# Altium PCB TIDA-01560_PCB.PcbDoc
Units mil, origin at the board's own origin, x right, y up, seen from the top; angles counter-clockwise.
Board outline 2598.43 x 1968.5 mil, 2 copper layers (Top Layer, Bottom Layer), stack 62 mil thick; 50 components, 29 nets, 112 pads, 8 vias.
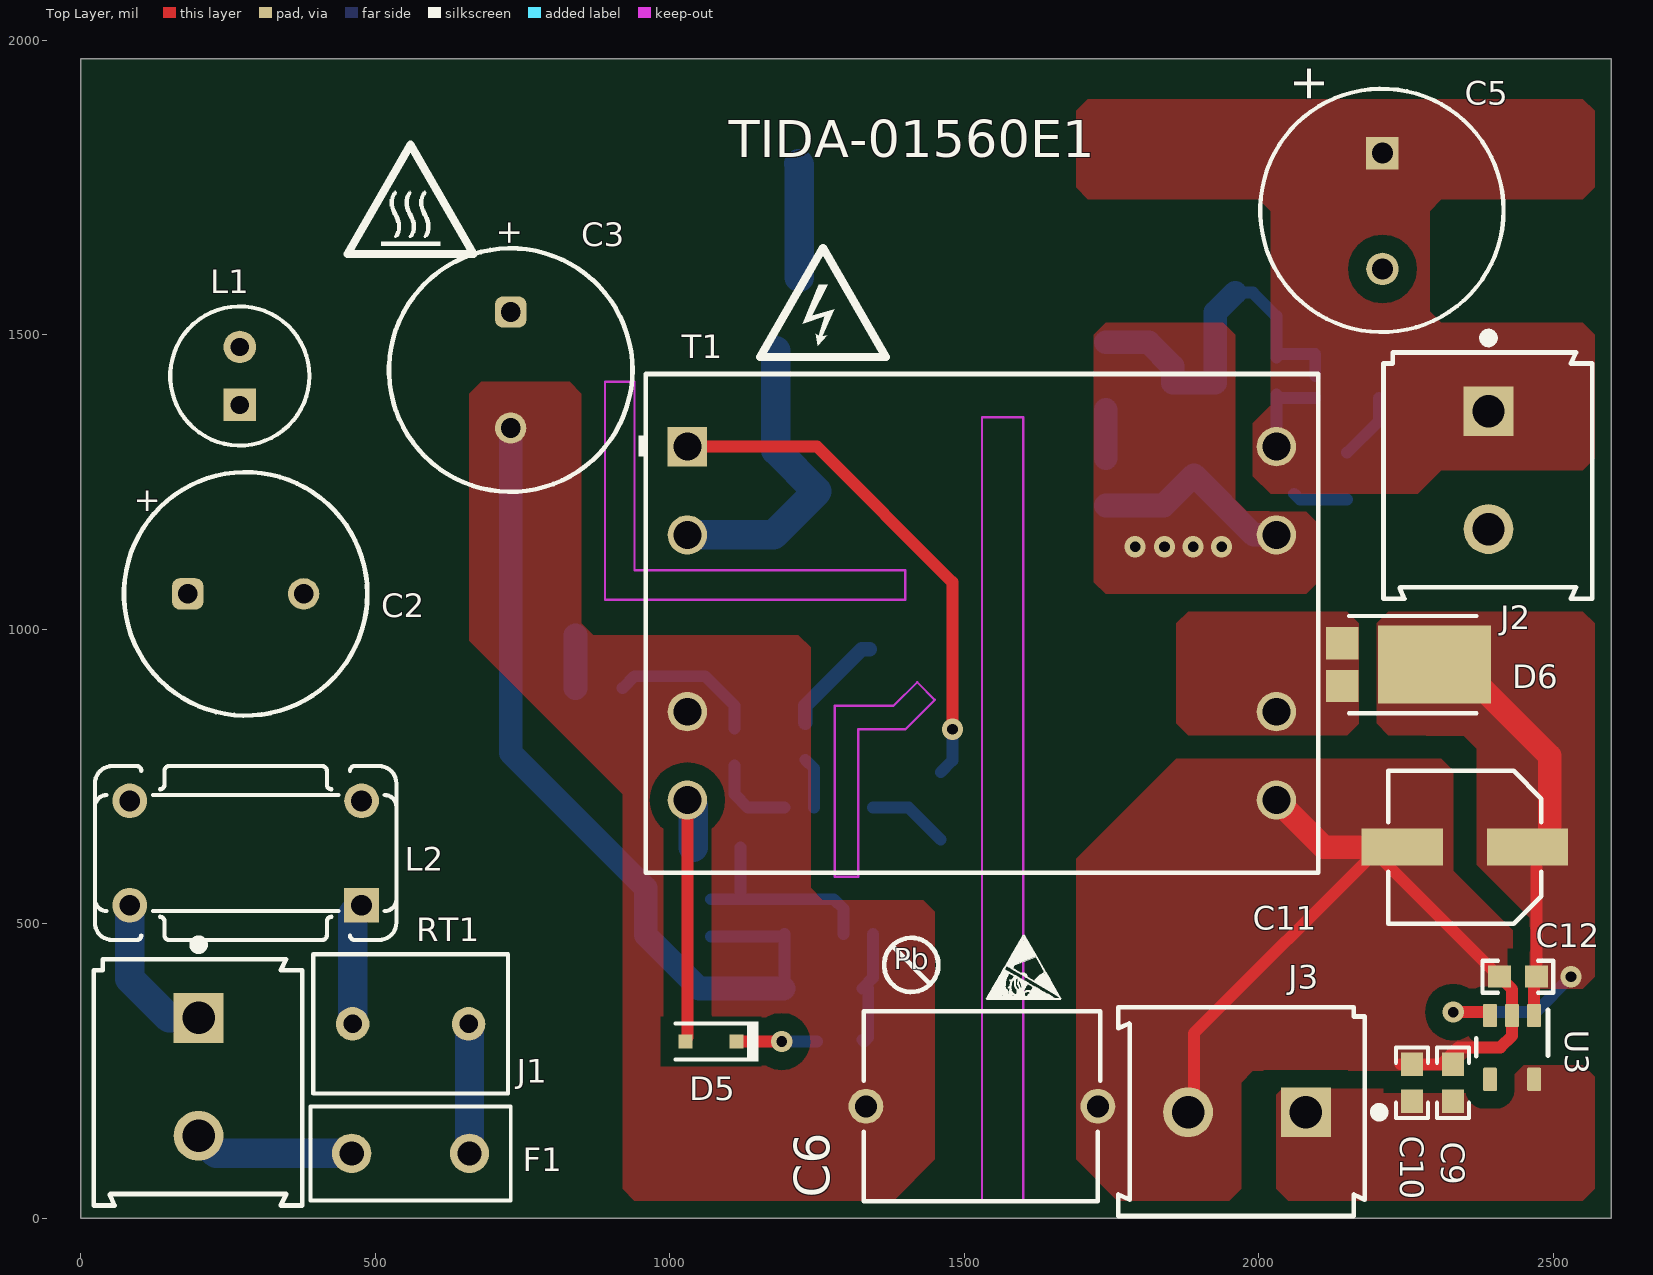
[diagram p0: Top Layer view]
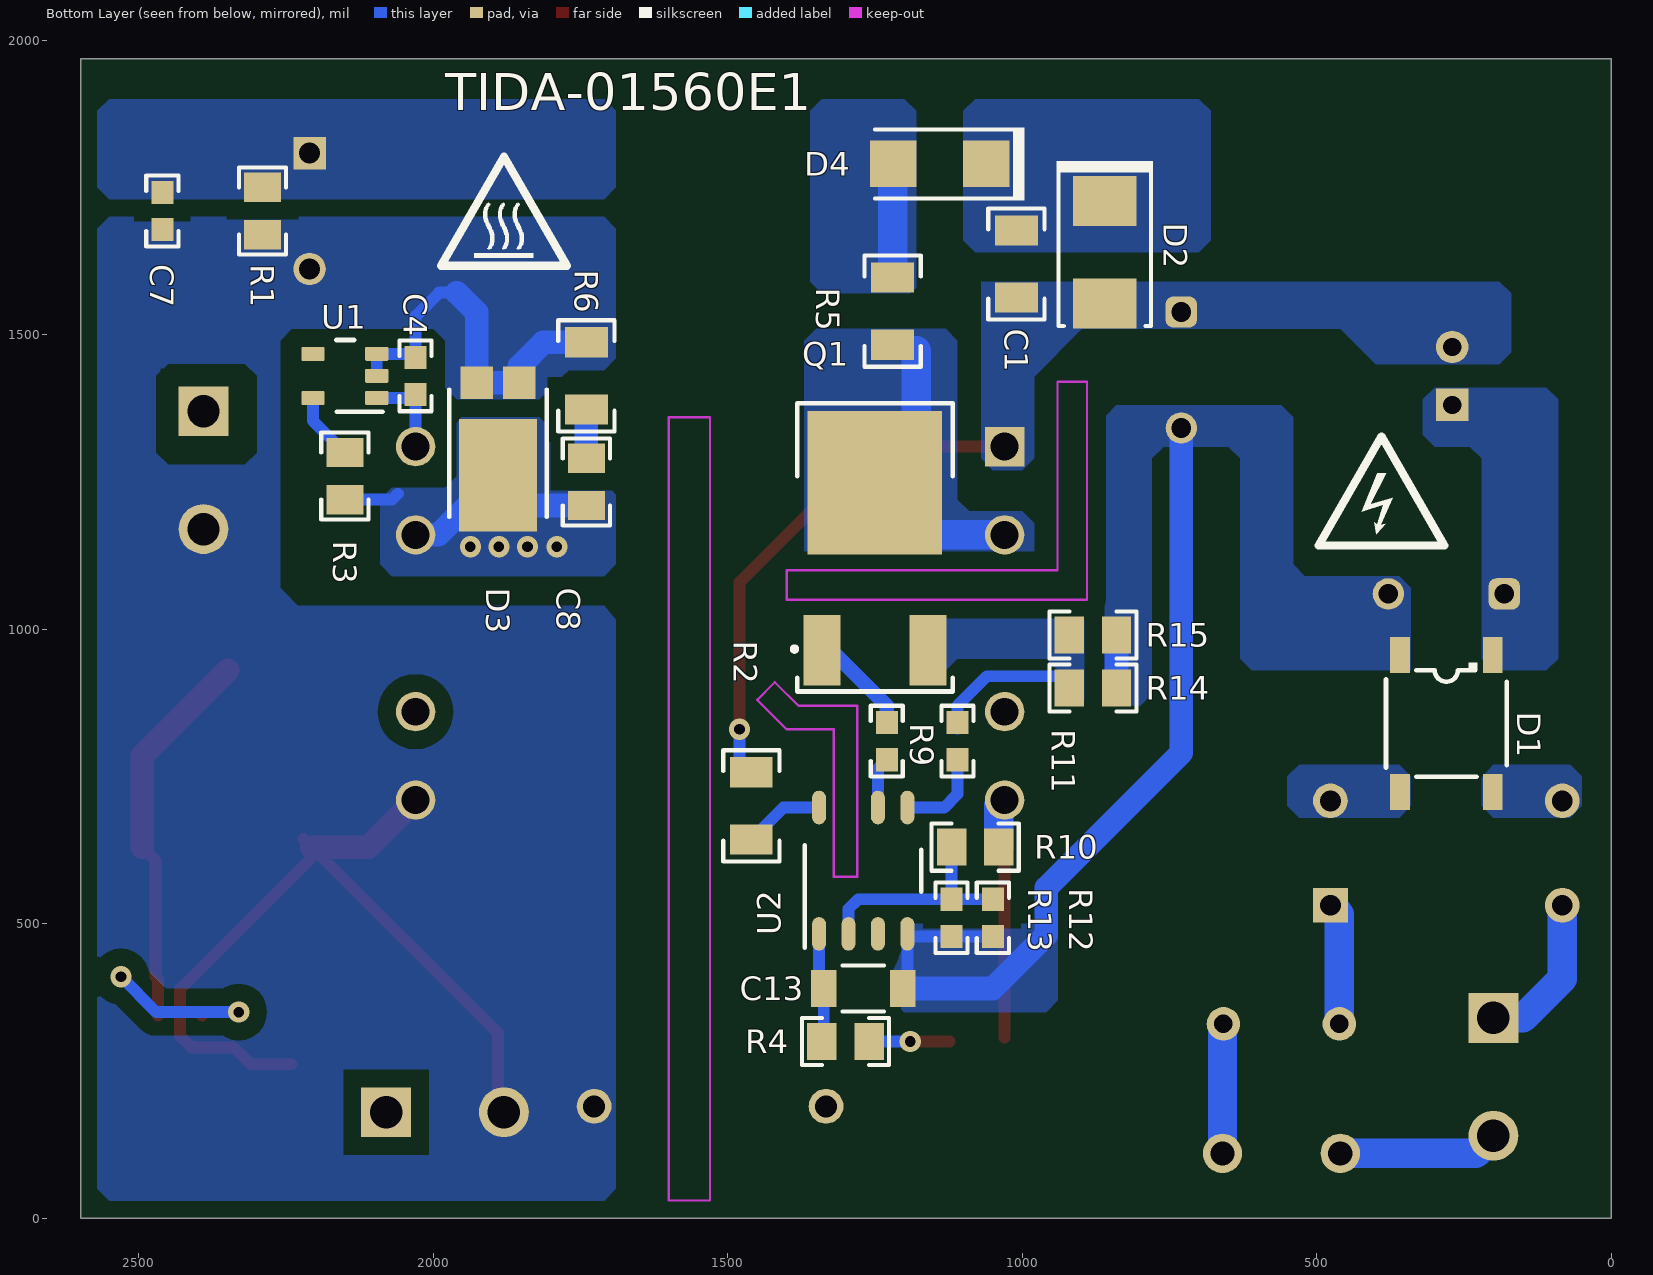
[diagram p1: Bottom Layer view, seen from below]
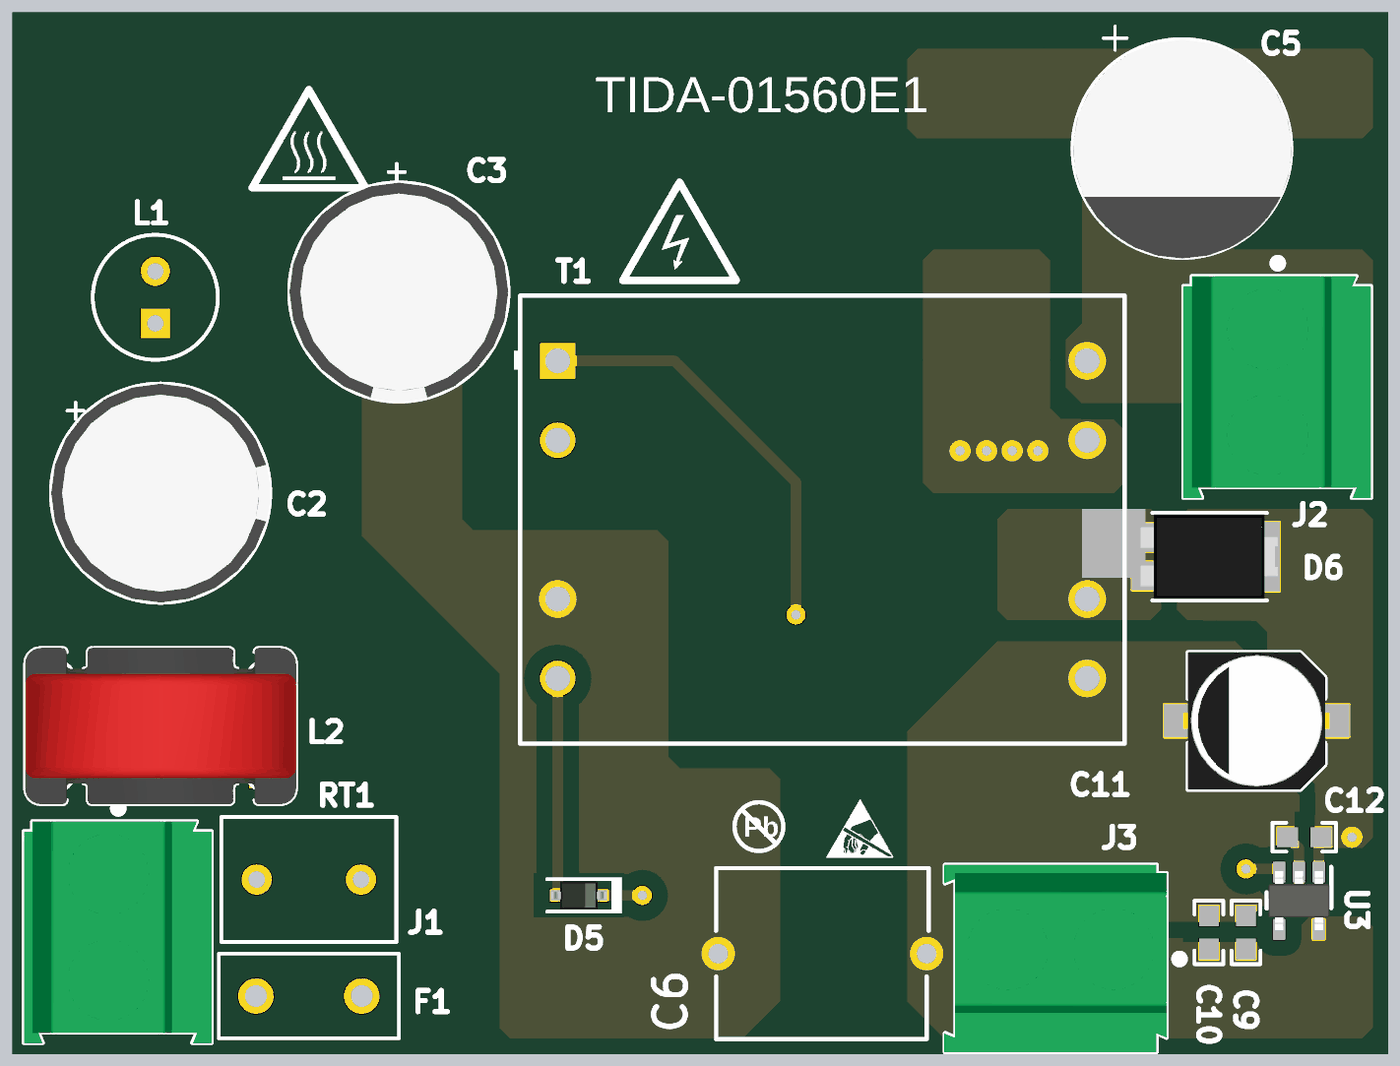
[diagram p2: 3D render of the assembled board from above, using the file's embedded part models]

## Layer stack, top to bottom
Top Solder: solder mask 0.4, Solder Resist, Dk 3.5
Top Layer: signal copper 1.4
Dielectric1: core 59.2, FR-4, Dk 4.8
Bottom Layer: signal copper 1.4
Bottom Solder: solder mask 0.4, Solder Resist, Dk 3.5

## Board outline
0,0 2598.43,0 2598.43,1968.5 0,1968.5

## Design rules (kind name [scope] priority, off if disabled: settings)
AcuteAngle [All] p1: minimum=4.50000000000000E+0001 checktracksonly=FALSE
AssemblyTestPointUsage [All] p1: valid=2
BoardOutlineClearance BoardOutlineClearance_MountingHoles [OnCopper and InComponentClass('Mounting Holes')] p1: gap=40
BoardOutlineClearance BoardOutlineClearance_Poly [OnCopper and IsPoly] p2: gap=25
BoardOutlineClearance [OnCopper and Not InComponentClass('Logo') and not InComponentClass('FiducialMark') and not InRegion(1000,500,4000,800) and not InPoly] p3: gap=40
Clearance Clearance_Keepouts [((IsTrack Or IsArc) And Not InPoly) And IsFree and IsKeepOut vs ((IsTrack Or IsArc) And Not InPoly) And IsFree and IsKeepOut] p1: gap=0
Clearance Clearance_Poly [InPolygon] p2: gap=30
Clearance [All] p3: gap=7.87
ComponentClearance ComponentClearance_MountingHoles_FiducialMarks [InComponentClass('Mounting Holes') vs InComponentClass('FiducialMark')] p1: gap=50 collisioncheckmode=3 verticalgap=10 showdistances=FALSE
ComponentClearance ComponentClearance_Shunt [InComponentClass('Header') vs InComponentClass('Shunt')] p2: gap=0 collisioncheckmode=3 verticalgap=0 showdistances=FALSE
ComponentClearance ComponentClearance_Logo [InComponentClass('Logo')] p3: gap=50 collisioncheckmode=3 verticalgap=10 showdistances=FALSE
ComponentClearance ComponentClearance_ScrewToNut [(HasFootprint('NY PMS 440 0025 PH')) vs (HasFootprint('Keystone_1902C'))] p4: gap=5 collisioncheckmode=3 verticalgap=10 showdistances=FALSE
ComponentClearance ComponentClearance_MountingHoles [InComponentClass('Mounting Holes')] p5: gap=250 collisioncheckmode=3 verticalgap=100000 showdistances=FALSE
ComponentClearance ComponentClearance_SmallPassives [HasFootprint('0201*') or HasFootprint('0402*') or HasFootprint('0508') or HasFootprint('0603*') or HasFootprint('0612') or HasFootprint('0805*') or HasFootprint('0815*') or HasFootprint('0830*') or HasFootprint('1206*') or HasFootprint('1210*') or HasFootprint('1808*') or HasFootprint('1812*') or HasFootprint('1825*') or HasFootprint('2010*') or HasFootprint('2220*') or HasFootprint('2225*') or HasFootprint('2512*') or HasFootprint('2728*') or HasFootprint('3518*') vs HasFootprint('0201*') or HasFootprint('0402*') or HasFootprint('0508') or HasFootprint('0603*') or HasFootprint('0612') or HasFootprint('0805*') or HasFootprint('0815*') or HasFootprint('0830*') or HasFootprint('1206*') or HasFootprint('1210*') or HasFootprint('1808*') or HasFootprint('1812*') or HasFootprint('1825*') or HasFootprint('2010*') or HasFootprint('2220*') or HasFootprint('2225*') or HasFootprint('2512*') or HasFootprint('2728*') or HasFootprint('3518*')] p6: gap=10 collisioncheckmode=3 verticalgap=10 showdistances=FALSE
ComponentClearance ComponentClearance_THtoSMT [IsThruComponent vs IsSMTComponent] p7: gap=10 collisioncheckmode=3 verticalgap=10 showdistances=FALSE
ComponentClearance ComponentClearance_THtoTH [IsThruComponent vs IsThruComponent] p8: gap=10 collisioncheckmode=3 verticalgap=10 showdistances=FALSE
ComponentClearance [All] p9: gap=10 collisioncheckmode=3 verticalgap=10 showdistances=FALSE
DiffPairsRouting [All] p1: maxlimit=100 minlimit=10 mostfreqgap=10 toplayer_minwidth=15 toplayer_maxwidth=15 toplayer_prefwidth=15 bottomlayer_minwidth=15 bottomlayer_maxwidth=15 bottomlayer_prefwidth=15 maxuncoupledlength=1000
FabricationTestPointUsage TestPointUsage [All] p1: valid=2 allowmultiple=FALSE
FabricationTestpoint Testpoint [All] p1: side=3 testpointundercomponent=TRUE minsize=40 maxsize=100 preferedsize=60 minholesize=0 maxholesize=40 preferedholesize=32 testpointgrid=1 allowsidetop=TRUE allowsidebottom=TRUE usegrid=TRUE gridtolerance=0.01
FanoutControl Fanout_LCC [IsLCC] p1: bgadir=Out bgaviamode=Centered fanoutstyle=Auto fanoutdirection=Alternating viagrid=1 // Fanout_LCC (Default Rule)
FanoutControl Fanout_BGA [IsBGA] p2: bgadir=Out bgaviamode=Centered fanoutstyle=Auto fanoutdirection=Alternating viagrid=1 // Fanout_BGA (Default Rule)
FanoutControl Fanout_Default [All] p4: bgadir=Out bgaviamode=Centered fanoutstyle=Auto fanoutdirection=Alternating viagrid=1 // Fanout_Default (Default Rule)
FanoutControl Fanout_Small [(CompPinCount < 5)] p5: bgadir=Out bgaviamode=Centered fanoutstyle=Auto fanoutdirection=OutThenIn viagrid=1 // Fanout_Small (Default Rule)
HoleSize [All] p1: absolutevalues=TRUE maxlimit=251 minlimit=7.87 maxpercent=80.000 minpercent=20.000
MinimumAnnularRing MinimumAnnularRing_ThermalPadVias [IsVia and InAnyComponent] p1: minimumring=5.91
MinimumAnnularRing [All] p2: minimumring=8
MinimumSolderMaskSliver MinimumSolderMaskSliver_Logo [InComponentClass('Logo') vs InComponentClass('Logo')] p1: minsoldermaskwidth=0.7
MinimumSolderMaskSliver [All] p2: minsoldermaskwidth=3.94
PlaneConnect [All] p1: planeconnectstyle=Relief reliefexpansion=10 reliefentries=4 reliefconductorwidth=10 reliefairgap=10
PolygonConnect [All] p1: connectstyle=Direct reliefconductorwidth=10 reliefentries=4 polygonreliefangle="90 Angle" airgapwidth=10
RoutingVias ThermalPadVias [IsVia and InAnyComponent] p1: holewidth=7.87 width=19.68 viastyle="Through Hole" minholewidth=7.87 minwidth=19.68 maxholewidth=12.99 maxwidth=23.62
RoutingVias [All] p2: holewidth=16 width=34 viastyle="Through Hole" minholewidth=7.87 minwidth=26 maxholewidth=40 maxwidth=65
SilkToBoardRegionClearance [Not ((IsComment or IsDesignator) And (Hide <> 'False')) and not InRegion(1000,500,4000,800)] p1:
SilkToSilkClearance SilkToSilkClearance_Pb-FreeLogo [(HasFootprint('Pb-Free_Overlay_Medium') OR HasFootprint('Pb-Free_Overlay_Small')) vs (HasFootprint('Pb-Free_Overlay_Medium') OR HasFootprint('Pb-Free_Overlay_Small'))] p1: silktosilkclearance=0
SilkToSilkClearance [All] p2: silktosilkclearance=4
SilkToSolderMaskClearance SilkToComponentPadClearance [(IsPad or IsFill or IsRegion) and InAnycomponent] p1: minsilkscreentomaskgap=3 clearancetoexposedcopper=TRUE
SilkToSolderMaskClearance "Silk to Solder Mask Opening" [All] p2: minsilkscreentomaskgap=3 clearancetoexposedcopper=FALSE
SolderMaskExpansion [All] p1: expansion=1.97
Width [All] p1: maxlimit=100 minlimit=6 preferedwidth=10 checkconnectedcopper=TRUE
15 further rules are at their usual default settings.

## Classes and differential pairs
component class TIDA-01560_BlankSheet: C1 C2 C3 C4 C5 C6 C7 C8 C9 C10 C11 C12 C13 D1 D2 D3 D4 D5 D6 F1 J1 J2 J3 L1 L2 Q1 R1 R2 R3 R4 R5 R6 R9 R10 R11 R12 R13 R14 R15 RT1 T1 U1 U2 U3
component class TIDA-01560_EVM_Hardware: !PCB

## Components (designator, comment, footprint, x,y, rotation, side; value= is the part's Value field where it differs from the comment)
3 "CAUTION HOT SURFACE" IEC_HotSurface_small 1880,1710 r180 bottom
4 "CAUTION HOT SURFACE" IEC_HotSurface_small 560,1730 r0 top
5 "HIGH VOLTAGE" IEC_HighVoltage_small 1260,1550 r0 top
6 "HIGH VOLTAGE" IEC_HighVoltage_small 390,1230 r180 bottom
C1 "GRM31A7U2J471JW31D" 1206 1010,1620 r90 bottom
C2 "400AX10M10X12.5" AX_1000x1250 280,1060 r0 top
C3 "400AX10M10X12.5" AX_1000x1250 730,1440 r270 top
C4 "06033C105KAT2A" 0603 2030,1430 r90 bottom
C5 "RR71C331MDN1" R7_1000x1250 2210,1710 r270 top
C6 "DE1E3KX222MN5AA01" KX_1000x800x1400 1530,190 r180 top
C7 "C0603C104K3RACTU" 0603 2460,1710 r270 bottom
C8 "GCM2165C2A101JA16D" 0805_HV 1740,1250 r270 bottom
C9 "C1608X7R1E105K080AB" 0603 2330,230 r90 top
C10 "C0603C104K3RACTU" 0603 2260,230 r90 top
C11 "UUD0J221MCL1GS" SM_RADIAL_6.3AMM 2350,630 r180 top
C12 "C1608X7R1E105K080AB" 0603 2440,410 r180 top
C13 "C3216X7R1H475K160AC" 1206_180 1270,390 r180 bottom
D1 "MDB6S" MICRODIP_4 280,840 r270 bottom
D2 "SMBJ130A-13-F" SMB 860,1640 r270 bottom
D3 "PDS5100-13" PowerDI5 1890,1340 r270 bottom
D4 "MRA4007T3G" SMA 1140,1790 r0 bottom
D5 "BAS20HT1G" sod-323 1070,300 r180 top
D6 "PDS5100-13" PowerDI5 2220,940 r0 top
ESD "ESD Susceptible" ESD_Overlay_small 1600,420 r0 top
F1 "39213150000" FUSE_392 560,110 r180 top
J1 "282841-2" TEC_282841-2 200,240 r270 top
J2 "282841-2" TEC_282841-2 2390,1270 r270 top
J3 "282841-2" TEC_282841-2 1980,180 r180 top
L1 "7447462471" WE-TI_5075 270,1430 r90 top
L2 "744821201" WE-CMB_XS 280,620 r180 top
Pb "Pb-Free Symbol" Pb-Free_Overlay_Small 1410,430 r0 top
Q1 "SW4N65K" TO-252 1250,1160 r90 bottom
R1 "CRCW0805240KJNEA" 0805_HV 2290,1710 r90 bottom
R2 "CRCW12060000Z0EA" 1206 1460,700 r90 bottom
R3 "CRCW08050000Z0EA" 0805_HV 2150,1260 r90 bottom
R4 "CRCW080510R0JNEA" 0805_HV 1300,300 r0 bottom
R5 "CRCW12060000Z0EA" 1206 1220,1540 r270 bottom
R6 "CRCW120610R0JNEA" 1206 1740,1430 r90 bottom
R9 "CRCW06032R00FKEA" 0603 1230,810 r90 bottom
R10 "CRCW080562K0JNEA" 0805_HV 1080,630 r0 bottom
R11 "CRCW06031K00JNEA" 0603 1110,810 r90 bottom
R12 "CRCW060333K0JNEA" 0603 1050,510 r90 bottom
R13 "CRCW0603510KJNEA" 0603 1120,510 r90 bottom
R14 "CRCW08051R00JNEA" 0805_HV 880,900 r0 bottom
R15 "CRCW08055R10JNEA" 0805_HV 880,990 r0 bottom
RT1 "B57153S0479M051" S153 560,330 r180 top
T1 "Used in BOM report" PCBCOMPONENT_1 1530,1010 r0 top
U1 "UCC24650DBVR" DBV0005A_N 2150,1430 r0 bottom
U2 "UCC28730DR" D0007A_N 1270,590 r90 bottom
U3 "TLV74333PDBVR" DBV0005A_N 2430,290 r270 top

## Footprints (in the part's own frame and the unit in brackets; to place one, negate y for a bottom-side part, rotate by r counter-clockwise, add the part's x,y. Pads: shape width x height; smd on the part's side, far side on the other; paste and mask are expansions set on the pad)
0603 [mm] "0603 from SM-752 data"
  rect 1x0.95 smd: 1(-0.8,0) 2(0.8,0)
  silkscreen extent -1.52,-0.69 1.52,0.69, body extent -0.87,-0.47 0.87,0.47, height 1
0805_HV [mil] "0805 with 30mil clearance between pads"
  rect 50x63 smd: 1(-40,0) 2(40,0)
  silkscreen extent -74,-40 74,40, body extent -43,-29 43,29, height 57
1206 [mm] "1206 from SM-752 data"
  rect 1.3x1.85 smd: 1(-1.45,0) 2(1.45,0)
  silkscreen extent -2.4,-1.21 2.4,1.21, body extent -1.7,-0.9 1.7,0.9, height 1.35
1206_180 [mm] "1206_180"
  rect 1.1x1.6 smd: 1(-1.7,0) 2(1.7,0)
  silkscreen extent -0.9,-1 0.9,1, body extent -1.75,-0.95 1.75,0.95, height 1.8
AX_1000x1250 [mm] "TH, 2-Leads, Dia 10mm, Lead Spacing 5mm"
  rrect50% 1.35x1.35 hole 0.85: 1(-2.5,0)
  round 1.35 hole 0.85: 2(2.5,0)
  silkscreen extent -5.25,-5.25 5.25,5.25, body extent -5.25,-5.25 5.26,5.25, height 14.51
D0007A_N [mm] "SOIC, 7-Leads, Body 4.9x3.9mm, Pitch 1.27mm, IPC Medium Density"
  oval 1.45x0.6 smd: 1(-2.725,1.905) 2(-2.725,0.635) 3(-2.725,-0.635) 4(-2.725,-1.905) 5(2.725,-1.905) 6(2.725,-0.635) 8(2.725,1.905)
  silkscreen extent -3.32,-2.5 1.1,2.52, body extent -3.01,-2.45 3.01,2.45, height 1.75
DBV0005A_N [mm] "SOT23, 5-Leads, Body 2.9x1.6mm, Pitch 0.95mm, Lead Span 2.8mm, IPC Medium Density"
  rrect17% 1x0.6 smd: 1(-1.375,0.95) 2(-1.375,0) 3(-1.375,-0.95) 4(1.375,-0.95) 5(1.375,0.95)
  silkscreen extent -1.63,-1.55 0.38,1.55, body extent -1.42,-1.46 1.42,1.46, height 1.09
ESD_Overlay_small [mil]
  silkscreen extent -62,-48 64,61
FUSE_392 [mm] "LITTELFUSE"
  round 1.7 hole 1.05: 1(-2.54,0) 2(2.54,0)
  silkscreen extent -4.32,-2.03 4.32,2.03, body extent -4.25,-2 4.25,2, height 8
IEC_HighVoltage_small [mil]
  silkscreen extent -107,-88 107,97
IEC_HotSurface_small [mil]
  silkscreen extent -107,-93 107,92
KX_1000x800x1400 [mm] "MuRata"
  round 1.5 hole 0.95: 1(-5,0) 2(5,0)
  silkscreen extent -5.1,-4.1 5.1,4.1, body extent -5.31,-4 5.35,4, height 11.99
MICRODIP_4 [mm] "FAIRCHILD"
  rect 1.55x0.85 smd: 1(-2.95,2) 2(-2.95,-2) 3(2.95,-2) 4(2.95,2)
  silkscreen extent -2.63,-2.6 2.3,2.6, body extent -3.4,-2.57 3.4,2.57, height 1.45
Pb-Free_Overlay_Small [mil]
  silkscreen extent -46,-46 46,46
PCBCOMPONENT_1 [mm]
  rect 1.7x1.7 hole 1.2: 1(-12.7,7.62)
  round 1.7 hole 1.2: 2(-12.7,3.81) 4(-12.7,-3.81) 5(-12.7,-7.62) 6(12.7,-7.62) 7(12.7,-3.81) 9(12.7,3.81) 10(12.7,7.62)
  silkscreen extent -14.8,-10.75 14.5,10.75, body extent -14.5,-10.75 14.5,10.75, height 12.01
PowerDI5 [mm] "Diodes Inc recommended land pattern, ap02001.pdf rev 60"
  rect 1.4x1.39 smd: 1(-1.991,0.92) 2(-1.991,-0.92)
  rect 4.86x3.36 smd: 3(1.991,0)
  silkscreen extent -1.7,-2.1 3.8,2.1, body extent -2.27,-2.02 4.33,2.03, height 1.17
R7_1000x1250 [mm] "Nichicon FPCAP: Capacitor, Electrolytic, Radial; Body 10 x 12.5 mm (Dia.xH typ); Pin Spacing 5 mm (typ)"
  rect 1.4x1.4 hole 0.889: 1(-2.5,0)
  round 1.4 hole 0.889: 2(2.5,0)
  silkscreen extent -5.27,-5.27 5.22,5.22, body extent -5.25,-5.24 5.25,5.24, height 14.01
S153 [mm] "EPCOS"
  round 1.45 hole 0.8: 1(-2.5,0) 2(2.5,0)
  silkscreen extent -4.2,-3 4.2,3, body extent -4.23,-3 4.23,3, height 12.99
SM_RADIAL_6.3AMM [mm] "Nichicon 6.3x5.8"
  rect 3.5x1.6 smd: 1(-2.7,0) 2(2.7,0)
  silkscreen extent -3.3,-3.29 3.3,3.31, body extent -3.5,-3.3 3.5,3.3, height 6.11
SMA [mm] "Molded Diode, 2-Leads, Body 4.3x2.6mm, IPC Medium Density, based on OnSemi component dimensions and land pattern"
  rect 2x2 smd: 1(-2,0) 2(2,0)
  silkscreen extent -3.66,-1.57 2.79,1.57, body extent -2.6,-1.3 2.6,1.3, height 2.42
SMB [mil] "Molded Diode, 2-Leads, Body 5.4x3.6mm, IPC Medium Density, based on OnSemi component dimensions"
  rect 85x107.99 smd: 1(-87.01,0) 2(87.01,0)
  silkscreen extent -155,-82 125,82, body extent -106,-71 106,71, height 91
sod-323 [mm] "NXP recommended land pattern"
  rect 0.6x0.6 smd paste-0.05: 1(-1.1,0) 2(1.1,0)
  silkscreen extent -2.06,-0.86 1.53,0.86, body extent -1.3,-0.67 1.3,0.68, height 1.1
TEC_282841-2 [mm] "TE Connectivity"
  rect 2.15x2.15 hole 1.4: 1(-2.54,0)
  round 2.15 hole 1.4: 2(2.54,0)
  silkscreen extent -5.9,-4.52 5.55,4.47, body extent -5.08,-4.52 5.58,4.48, height 15.2
TO-252 [mm] "D-PAK, 3-Pads, Body 6.2x6.7mm (max), IPC Medium Density_modified 2008-05-02 to match OnSemi land pattern"
  rect 3.05x1.6 smd: 1(-4.97,2.28) 3(-4.97,-2.28)
  rect 6.2x5.8 smd: 4(2.25,0)
  silkscreen extent -6.75,-3.35 5.68,3.55, body extent -2.1,-3.35 4.1,3.35, height 2.39
WE-CMB_XS [mm] "WE-CMB Series Size XS"
  rect 1.5x1.5 hole 0.9: 1(-5,2.25)
  round 1.5 hole 0.9: 2(-5,-2.25) 3(5,-2.25) 4(5,2.25)
  silkscreen extent -6.5,-3.75 6.5,3.75, body extent -6.5,-3.75 6.5,3.75, height 16.24
WE-TI_5075 [mm] "Wurth WE-TI 5075"
  rect 1.4x1.4 hole 0.787: 1(-1.25,0)
  round 1.4 hole 0.787: 2(1.25,0)
  silkscreen extent -3,-3 3,3, body extent -3,-3 3,3, height 8.5

## Part data
3 4: library part IEC_HotSurface, "IEC 61010-1 Hot Surface Warning"
5 6: library part IEC_HighVoltage, "IEC 61010-1 High Voltage Warning"
C1: "CAP, CERM, 470 pF, 630 V, +/- 5%, U2J, 1206"
C2 C3: "CAP, AL, 10 μF, 400 V, +/- 20%, TH"
C4 C9 C12: "CAP, CERM, 1 μF, 25 V,+/- 10%, X7R, 0603"
C5: "CAP, AL, 330 μF, 16 V, +/- 20%, 0.007 ohm, TH"
C6: "CAP, CERM, 2200 pF, X1 250 VAC/Y1 300 VAC, +/- 20%, E, 10.0x8.0x14.0mm"
C7 C10: "CAP, CERM, 0.1 μF, 25 V,+/- 10%, X7R, 0603"
C8: "CAP, CERM, 100 pF, 100 V,+/- 5%, C0G/NP0, AEC-Q200 Grade 1, 0805"
C11: "CAP, AL, 220 μF, 6.3 V, +/- 20%, 0.44 ohm, SMD"
C13: "CAP, CERM, 4.7 μF, 50 V,+/- 10%, X7R, 1206"
D1: "Diode, Switching-Bridge, 600 V, 1 A, MICRODIP_4"
D2: "Diode, TVS, Uni, 130 V, 209 Vc, SMB"
D3 D6: "Diode, Schottky, 100 V, 5 A, PowerDI5"
D4: "Diode, Standard Recovery Rectifier, 1000 V, 1 A, AEC-Q101, SMA"
D5: "Diode, Switching, 200 V, 0.2 A, AEC-Q101, SOD-323"
ESD: library part ESD_Susceptible, "ESD Susceptible Symbol"
F1: "Fuse, 3.15 A, 250VAC/VDC, TH"
J1 J2 J3: "Terminal Block, 2x1, 5.08mm, TH"
L1: "Inductor, Unshielded Drum Core, Ferrite, 470 μH, 0.35 A, 1.58 ohm, TH"
L2: "Coupled inductor, 1 mH, 2 A, 0.045 ohm, TH"
Pb: library part Pb-Free
Q1: library part IXTY02N120P, "MOSFET, N-CH, 650 V, 4 A, TO-252"
R1: "RES, 240 k, 5%, 0.125 W, 0805"
R2 R5: "RES, 0, 5%, 0.25 W, 1206"
R3: "RES, 0, 5%, 0.125 W, 0805"
R4: "RES, 10, 5%, 0.125 W, 0805"
R6: "RES, 10, 5%, 0.25 W, 1206"
R9: "RES, 2.00, 1%, 0.1 W, 0603"
R10: "RES, 62 k, 5%, 0.125 W, 0805"
R11: "RES, 1.0 k, 5%, 0.1 W, 0603"
R12: "RES, 33 k, 5%, 0.1 W, 0603"
R13: "RES, 510 k, 5%, 0.1 W, 0603"
R14: "RES, 1.0, 5%, 0.125 W, 0805"
R15: "RES, 5.1, 5%, 0.125 W, 0805"
RT1: "Thermistor NTC, 4.70 ohm, 20%, 8.5mm Disc"
T1: library part Component_1
U1: "200-V Wake-Up Monitor for Fast Transient PSR, DBV0005A"
U2: "Constant-Voltage Constant-Current Flyback Controller With PSR and Wake-Up Monitoring, D0007A"
U3: "Low-Dropout Regulator, DBV0005A (SOT-23-5)"

## Via types
v1: diameter 36, hole 18, Top Layer to Bottom Layer, 8 vias

## Nets (pads, with @x,y where several pads share a name; then routed paths per layer and width w, separated by ;. In a path a pad name is that pad's centre, name@x,y a point inside that pad or via, vN(x,y) a via of type N, cw(c..) or ccw(c..) an arc to the next point about the centre after c; other vN are vias at no path point)
NetC1_1: C1.1 C3.1 D2.2 L1.2 R2.2 T1.1 | length 876.5
  Top Layer w20: T1.1 1250,1310 1480,1080 v1(1480,830)
  Bottom Layer w20: R2.2 1480,777.09 v1(1480,830)
NetC1_2: C1.2 D2.1 D4.1
NetC2_1: C2.1 D1.1 L1.1
NetC4_1: C4.1 C5.1 C7.1 J2.1 R1.2 T1.10 U1.1 | length 156.8
  Bottom Layer w20: T1.10 C4.1 2035.91,1392.6 U1.1
NetC8_1: C8.1 R6.1 | length 82.9
  Bottom Layer w40: C8.1 R6.1
NetC8_2: C8.2 D3.3 R3.1 T1.9 | length 447.6
  Bottom Layer w20: 2060,1230 2070,1220 R3.1
  Bottom Layer w40: C8.2 1838.39,1210 D3.3 1991.61,1160 T1.9
  other v1: 1790,1140 1840,1140 1888.41,1140 1936.83,1140
NetC9_1: C9.1 C10.1 J3.1 U3.5
NetC11_1: C11.1 C12.1 D6.3 U3.1 U3.3 | length 946.7
  Top Layer w20: v1(2330,350) 2386.73,350 U3.3 ; U3.1 2467.4,405.91 C12.1 2471.5,607.8 C11.1@2493.7,630
  Top Layer w40: D6.3@2348.74,930 2493.7,785.04 C11.1@2493.7,630
  Bottom Layer w20: v1(2330,350) 2470,350 v1(2530,410)
NetC13_1: C13.1 R4.2 U2.1 | length 197.4
  Bottom Layer w20: R4.2@1326.93,303.07 1330,300 1336.93,306.93 C13.1 ; C13.1@1326.93,390 1345,408.07 U2.1
NetD1_3: D1.3 L2.2
NetD1_4: D1.4 L2.3
NetD4_2: D4.2 R5.1 | length 193.4
  Bottom Layer w50: D4.2 1220,1788.74 R5.1
NetD5_1: D5.1 R4.1 | length 126.7
  Top Layer w20: D5.1@1123.31,300 v1(1190,300)
  Bottom Layer w20: v1(1190,300) R4.1@1250,300
NetD6_1: D6.1 D6.2 T1.7
NetF1_1: F1.1 RT1.1 | length 220.7
  Bottom Layer w50: RT1.1 660,328.43 F1.1
NetF1_2: F1.2 J1.2 | length 272.4
  Bottom Layer w50: J1.2 230,110 F1.2
NetJ1_1: J1.1 L2.4 | length 269.1
  Bottom Layer w50: L2.4 83.15,406.85 150,340 J1.1
NetL2_1: L2.1 RT1.2 | length 207.7
  Bottom Layer w50: RT1.2 461.57,516.14 L2.1
NetQ1_1: Q1.1 R9.2 | length 178.1
  Bottom Layer w25: R9.2 1230,870 1326.14,966.14 Q1.1@1339.76,966.14
NetQ1_3: Q1.3 R11.2 R14.2 R15.2 | length 257.5
  Bottom Layer w20: R14.2 940,920 1060,920 1110,870 R11.2@1110,831.5
NetQ1_4: Q1.4 R5.2 T1.2 | length 518.6
  Bottom Layer w50: T1.2 1176.14,1160 1250,1233.86 1180,1303.86 1180,1472.91
NetR2_1: R2.1 U2.8 | length 137.5
  Bottom Layer w20: U2.8 1405.63,697.28 R2.1
NetR3_2: R3.2 U1.5 | length 115
  Bottom Layer w20: R3.2 2204.13,1354.13 U1.5
NetR9_1: R9.1 U2.6 | length 87.4
  Bottom Layer w20: R9.1 1245,763.5 U2.6
NetR10_2: R10.2 R12.2 R13.2 U2.2 | length 362.6
  Bottom Layer w20: 1070,541.5 R13.2 ; R10.2 R13.2 ; U2.2 1295,525 1278.5,541.5 R13.2
NetR11_1: R11.1 U2.5 | length 142.9
  Bottom Layer w20: R11.1@1110,768.5 1110,720 1132.72,697.28 U2.5
PGND: C2.2 C3.2 C6.2 C13.2 D1.2 R12.1 R13.1 R14.1 R15.1 T1.4 U2.4 | length 1537.5
  Bottom Layer w20: 1070,478.5 R13.1 1190.79,478.5 U2.4 1195,391.93 C13.2@1193.07,390
  Bottom Layer w40: C3.2 730,790 959.13,560.87 959.13,480.87 1050,390 C13.2@1193.07,390 ; R14.1 R15.1
SGND: C4.2 C5.2 C6.1 C7.2 C9.2 C10.2 C11.2 C12.2 D3.1 D3.2 J2.2 J3.2 R1.1 R6.2 T1.6 U1.2 U1.3 U3.2 | length 2093.3
  Top Layer w20: J3.2@1890,180 1890,313.7 C11.2@2206.3,630 ; C11.2@2220,643.7 C11.2@2206.3,630 ; 2240,261.5 2310,261.5 2338.5,290 2410.31,290 2430,309.69 U3.2 2430,388.5 C12.2 2206.3,612.2 C11.2@2206.3,630
  Top Layer w40: T1.6 2110,630 C11.2@2206.3,630
  Bottom Layer w20: 1960,1571.57 1990,1571.57 2030,1531.57 C4.2 2035.91,1467.4 U1.3 U1.2
  Bottom Layer w40: R6.2 1812.91,1487.09 1853.78,1446.22 D3.1 D3.2 1926.22,1537.8 1960,1571.57
VAUX: D5.2 R10.1 T1.5 | length 487.4
  Top Layer w20: D5.2@1030,306.69 T1.5
  Bottom Layer w50: T1.5 1040,700 R10.1
pads on no net: U1.4 U2.3 U3.4

## Polygon pours and split planes (outlines as drawn)
NetC9_1 on Top Layer "Top Layer-No Net 5" (solid, remove dead copper, pour order 48): 2030,50 2050,30 2550,30 2570,50 2570,240 2550,260 2450,260 2430,240 2430,210 2360,210 2350,220 2340,220 2040,220 2030,210 2030,50
NetC11_1 on Top Layer "Top Layer-No Net 3" (solid, remove dead copper, pour order 36): 2460,390 2510,390 2550,390 2570,410 2570,1010 2550,1030 2220,1030 2200,1010 2200,840 2220,820 2348.66,818.66 2370,797.32 2370,600 2400,570 2460,510
SGND on Top Layer "Top Layer-No Net 2" (solid, remove dead copper, pour order 34): 2010,780 1860,780 1690,610 1690,580 1690,100 1760,30 1950,30 1970,50 1970,230 1990,250 2180,250 2210,250 2330,250 2360,280 2370,280 2420,299.69 2440,480 2330,590 2330,760 2310,780 2190,780 2160,780 2120,780 2010,780 2000,780
NetC4_1 on Top Layer "Top Layer-No Net 1" (solid, remove dead copper, pour order 30): 1709.74,1900 1689.74,1880 1689.74,1750 1709.74,1730 2000,1730 2020,1710 2020,1380 1990,1350 1990,1320 1990,1260 2020,1230 2270,1230 2310,1270 2550,1270 2570,1290 2570,1500 2550,1520 2310,1520 2290,1540 2290,1710 2310,1730 2550,1730 2570,1750 2570,1860 2570,1880 2550,1900
PGND on Top Layer "Top Layer-No Net" (solid, remove dead copper, pour order 2): 660,1280 660,1120 660,980 700,940 840,800 920,720 920,50 940,30 1380,30 1450,100 1450,520 1430,540 1260,540 1239.25,560.75 1239.25,820.75 1239.25,969.25 1218.5,990 870,990 850,1010 850,1230 850,1400 830,1420 780,1420 680,1420 660,1400
NetD6_1 on Top Layer "Top Layer-No Net 4" (solid, remove dead copper, pour order 42): 2150,1030 2170,1010 2170,840 2150,820 1880,820 1860,840 1860,1010 1880,1030
NetC8_2 on Top Layer "Top Layer-No Net 6" (solid, remove dead copper, pour order 50): 1960,1450 1960,1220 1980,1200 2080,1200 2100,1180 2100,1080 2080,1060 1740,1060 1720,1080 1720,1500 1740,1520 1940,1520 1960,1500 1960,1433.23
PGND on Bottom Layer "Bottom Layer-No Net 3" (solid, remove dead copper, pour order 66): 340,930 610,930 630,950 630,1290 650,1310 760,1310 780,1330 780,1380 560,1380 540,1360 540,1110 520,1090 360,1090 340,1070 340,930
NetD1_3 on Bottom Layer "Bottom Layer-No Net 2" (solid, remove dead copper, pour order 64): 360,680 530,680 550,700 550,740 550,750 530,770 360,770 340,750 340,700
NetD1_4 on Bottom Layer "Bottom Layer-No Net 1" (solid, remove dead copper, pour order 58): 70,770 50,750 50,700 70,680 200,680 220,700 220,747.64 200,770 90,770
NetC2_1 on Bottom Layer "Bottom Layer-No Net" (solid, remove dead copper, pour order 56): 110,1410 90,1390 90,950 110,930 200,930 220,950 220,1290 240,1310 300,1310 320,1330 320,1390 300,1410
SGND on Bottom Layer "Bottom Layer-No Net 13" (solid, remove dead copper, pour order 32): 2260,1510 2260,1140 2260,1080 2260,1070 2220,1030 2570,1040 2570,1280 2370,1280 2320,1280 2300,1300 2300,1430 2320,1450 2450,1450 2470,1430 2470,1300 2450,1280 2330,1280 2570,1280 2570,1250 2570,1470 2570,1530 2280,1530
NetC4_1 on Bottom Layer "Bottom Layer-No Net 12" (solid, remove dead copper, pour order 28): 1710,1730 1690,1750 1690,1880 1710,1900 2550,1900 2570,1880 2570,1750 2550,1730
SGND on Bottom Layer "Bottom Layer-No Net 11" (solid, remove dead copper, pour order 26): 1860,1700 2320,1700 2550,1700 2570,1680 2570,1510 2550,1490 2500,1490 2260,1490 2240,1510 2190,1510 2110,1510 2000,1510 1980,1490 1980,1410 1960,1390 1820,1390 1770,1440 1710,1440 1690,1460 1690,1680 1710,1700
NetC8_2 on Bottom Layer "Bottom Layer-No Net 10" (solid, remove dead copper, pour order 24): 2030,1090 1720,1090 1710,1090 1690,1110 1690,1228.52 1711.48,1250 1780,1250 1800,1270 1800,1340 1820,1360 1952.68,1360 1960,1350 1960,1260 1980,1240 2070,1240 2090,1220 2090,1110 2070,1090
NetC1_1 on Bottom Layer "Bottom Layer-No Net 5" (solid, remove dead copper, pour order 14): 190,1590 170,1570 170,1470 190,1450 400,1450 440,1490 460,1510 770,1510 800,1540 800,1560 770,1590
NetC1_1 on Bottom Layer "Bottom Layer-No Net 6" (solid, remove dead copper, pour order 16): 771.42,1590 898.58,1590 988.5,1590 1040,1590 1070,1590 1070,1510 1070,1290 1050,1270 1000,1270 980,1290 980,1380 980,1428.58 898.58,1510 850,1510 770,1510 770,1590
PGND on Bottom Layer "Bottom Layer-No Net 7" (solid, remove dead copper, pour order 18): 760,1380 840,1380 860,1360 860,1100 860,1080 860,1020 860,880 850,870 800,870 780,890 780,1050 780,1290 760,1310
NetQ1_4 on Bottom Layer "Bottom Layer-No Net 8" (solid, remove dead copper, pour order 20): 1090,1110 1350,1110 1370,1130 1370,1490 1350,1510 1130,1510 1110,1490 1110,1220 1090,1200 1000,1200 980,1180 980,1130 1000,1110
NetQ1_3 on Bottom Layer "Bottom Layer-No Net 9" (solid, remove dead copper, pour order 22): 900,1020 1180,1020 1180,1000 1180,930 1180,920 1140,920 1110,950 1090.43,949.57 959.57,949.57 940,930 940,880 920,880 910,880 890,880 890,1010
SGND on Bottom Layer "Bottom Layer-No Net 14" (solid, remove dead copper, pour order 38): 1710,1040 1690,1016.3 1690,50 1710,30 2550,30 2570,50 2570,740 2570,760 2570,890 2570,1040 2550,1040 2310,1040
PGND on Bottom Layer "Bottom Layer-No Net 16" (solid, remove dead copper, pour order 44): 1050,500 1180,500 1190,500 1210,480 1210,440 1220,420 1220,370 1200,350 959.13,350 940,370 940,480.87 959.13,500
NetC1_2 on Bottom Layer "Bottom Layer-No Net 17" (solid, remove dead copper, pour order 52): 700,1900 1080,1900 1100,1880 1100,1660 1080,1640 700,1640 680,1660 680,1880 700,1900
NetD4_2 on Bottom Layer "Bottom Layer-No Net 18" (solid, remove dead copper, pour order 54): 1200,1900 1180,1880 1180,1580 1190,1570 1340,1570 1360,1590 1360,1880 1340,1900

## Keep-outs
Keep-Out Layer:
  lines w3.94: 890,1050 1400,1050 1400,1100 940,1100 940,1420 890,1420 890,1050 ; 1280,580 1280,590 1280,790 1280,870 1380,870 1420,910 1450,880 1400,830 1320,830 1320,630 1320,580 1280,580 ; 1530,30 1600,30 1600,1360 1530,1360 1530,30
  text ".Layer_Name" at 577,-858.49 h60

## Other copper
Top Layer:
  text ".Layer_Name" at 577,-858.49 h60
Bottom Layer:
  text ".Layer_Name" at 577,-858.49 h60

## Silkscreen, mask and mechanical layers (free items; w line width, h text height)
Top Overlay:
  text "TIDA-01560E1" at 1100,1780 h108.27
  text ".Layer_Name" at 577,-858.49 h60
Bottom Overlay:
  text "TIDA-01560E1" at 1980,1860 h108.27
  text ".Layer_Name" at 577,-858.49 h60
Top Paste:
  rectangle: 2020,900 2140,1030
  text ".Layer_Name" at 577,-858.49 h60
Bottom Paste:
  text ".Layer_Name" at 577,-858.49 h60
Top Solder:
  text ".Layer_Name" at 577,-858.49 h60
  text ".Layer_Name" at 577,-858.49 h60
Bottom Solder:
  text ".Layer_Name" at 577,-858.49 h60
Drill Guide:
  text ".Layer_Name" at 577,-858.49 h60
M1 Board Outline:
  the board outline again, w10
  text ".Layer_Name" at 577,-858.49 h60
M2 Board Dimensions:
  rectangle: 125,-400 500,-275
  rectangle: 0,-275 125,-150
  lines w7: 0,-275 1000,-275 ; 125,-400 125,-150 ; 250,-400 250,-150 ; 500,-400 500,-150 ; 750,-400 750,-150 ; 0,-400 0,-150 1000,-150 1000,-400 0,-400
  text ".Layer_Name" at 577,-858.49 h60
M3 3D STEP Top:
  text ".Layer_Name" at 577,-858.49 h60
M4 3D STEP Bottom:
  text ".Layer_Name" at 577,-858.49 h60
M5 Assembly Top:
  lines w10: -292,-930.17 6308,-930.17 ; -292,-726.83 6310,-726.83 ; -292,-523.5 -292,-1133.5 3713,-1133.5 6310,-1133.5 6310,-523.5 -291.5,-523.5 -291.5,-1133.5 1284,-1133.5 ; 2173,-1133.5 2173,-523.5 ; 3440,-726.83 3440,-523.5 ; 4280,-726.83 4280,-523.5 ; 4902,-1140 4902,-937.17
  text "COMPONENTS MARKED 'DNP' SHOULD NOT BE POPULATED." at 1153.5,-318.5 h60
  text "ASSEMBLY VARIANT:" at 1153,-434 h60
  text ".VariantName" at 2189,-434 h60
  text "PCB VIEWED FROM TOP SIDE" at -228.5,-655.67 h60
  text "BOARD #:" at 2248,-655.67 h60
  text ".PRJ_Number" at 2793.5,-655.67 h60
  text "REV:" at 3638,-655.67 h60
  text ".PCB_Rev" at 3929.5,-655.67 h60
  text "SVN REV:" at 4476,-655.67 h60
  text ".VersionControl_RevNumber" at 4982,-655.67 h60
  text "TID #:" at 2248,-859 h60
  text ".TID" at 2793.5,-859 h60
  text "PLOT NAME =" at -228.5,-1064.34 h60
  text ".plot_File_Name" at 577,-1064.34 h60
  text "GENERATED    :" at 2250,-1064.34 h60
  text ".Print_Date" at 3119.5,-1064.34 h60
  text ".Print_Time" at 3848.5,-1064.34 h60
  text "TEXAS INSTRUMENTS" at 5113,-1064.34 h60
M6 Assembly Bottom:
  lines w10: -292.5,-727.33 6309.5,-727.33 ; -290.5,-930.67 6309.5,-930.67 ; 1115.5,-1140.5 1115.5,-937.67 ; 1737.5,-727.33 1737.5,-524 ; 2577.5,-727.33 2577.5,-524 ; 3844.5,-1134 3844.5,-524 ; 4733.5,-1134 6309,-1134 6309,-524 -292.5,-524 -292.5,-1134 2304.5,-1134 6309.5,-1134 6309.5,-524
  text "COMPONENTS MARKED 'DNP' SHOULD NOT BE POPULATED." at 6102,-318 h60
  text ".VariantName" at 5058,-434 h60
  text "ASSEMBLY VARIANT:" at 6097,-434 h60
  text ".VersionControl_RevNumber" at 1035.5,-656.17 h60
  text "SVN REV:" at 1541.5,-656.17 h60
  text ".PCB_Rev" at 2088,-656.17 h60
  text "REV:" at 2379.5,-656.17 h60
  text ".PRJ_Number" at 3224,-656.17 h60
  text "BOARD #:" at 3769.5,-656.17 h60
  text "PCB VIEWED FROM BOTTOM SIDE" at 6246,-656.17 h60
  text ".TID" at 3224,-859.5 h60
  text "TID #:" at 3769.5,-859.5 h60
  text "TEXAS INSTRUMENTS" at 904.5,-1064.84 h60
  text ".Print_Time" at 2169,-1064.84 h60
  text ".Print_Date" at 2898,-1064.84 h60
  text "GENERATED    :" at 3767.5,-1064.84 h60
  text ".plot_File_Name" at 5440.5,-1064.84 h60
  text "PLOT NAME =" at 6246,-1064.84 h60
M9 Title Sheet:
  drawing of 57 lines, arcs and shapes, not listed
  text "1" at 739.84,8036.5 h70
  text "2" at 3235.5,8036.5 h70
  text "3" at 5724.84,8036.5 h70
  text "4" at 8231.51,8036.5 h70
  text "5" at 10730.5,8036.5 h70
  text "6" at 13235.5,8036.5 h70
  text "A" at -416.5,6893.5 h70
  text "A" at 14383.5,6893.5 h70
  text "B" at -416.5,4513.5 h70
  text "B" at 14383.5,4513.5 h70
  text "C" at -416.5,2138.5 h70
  text "C" at 14383.5,2138.5 h70
  text "PROJECT TITLE:" at 11343.5,277.5 h45
  text ".PRJ_Title" at 11393.5,144.17 h70
  text "DESIGNED FOR:" at 11343.5,-23.5 h45
  text ".PRJ_Customer" at 11393.5,-163.5 h70
  text "D" at -416.5,-231.5 h70
  text "D" at 14383.5,-231.5 h70
  text "FILE NAME:" at 11343.5,-323.5 h45
  text ".PCB_File_Name_No_Path" at 11393.5,-443.5 h70
  text "Texas Instruments (TI) and/or its licensors do not warrant the accuracy or completeness of this specification" at 6374,-605.34 h45
  text "ENGINEER:" at 11343.5,-613.5 h45
  text "LAYOUT BY:" at 12848.5,-613.5 h45
  text "or any information contained therein. TI and/or its licensors do not warrant that this design will meet" at 6329.01,-718 h45
  text ".PRJ_Engineer" at 11393.5,-768.49 h70
  text ".PCB_Layout" at 12899,-768.49 h70
  text "the specifications, will be suitable for your application or fit for any particular purpose, or will operate in" at 6329.01,-830.67 h45
  text ".Layer_Name" at 577,-858.49 h60
  text "ALTIUM DESIGNER VERSION:" at 12848.5,-923.5 h45
  text "an implementation. TI and/or its licensors do not warrant that the design is production worthy. You should" at 6329.01,-943.33 h45
  text "completely validate and test your design implementation to confirm the system functionality for your application." at 6374,-1056 h45
  text ".print_Scale" at 11393.5,-1056.83 h70
  text ".Application_BuildNumber" at 12899,-1056.83 h70
  text "1" at 739.84,-1263.5 h70
  text "2" at 3235.5,-1263.5 h70
  text "3" at 5724.84,-1263.5 h70
  text "4" at 8231.51,-1263.5 h70
  text "5" at 10730.5,-1263.5 h70
  text "6" at 13235.5,-1263.5 h70
M10 Fab Notes:
  drawing of 173 lines, arcs and shapes, not listed
  text "DESIGN INFORMATION" at 12378.02,6201 h60
  text "MIN. TRACK WIDTH:" at 11733.46,6021 h60
  text "8" at 12829.7,6021 h60
  text "MIL" at 12984.46,6021 h60
  text "MIN. CLEARANCE:" at 11733.46,5889 h60
  text "0.2" at 12769.7,5889 h60
  text "mm" at 12984.46,5889 h60
  text "MIN. VIA PAD SIZE:" at 11733.46,5757 h60
  text "24" at 12799.71,5757 h60
  text "MIL" at 12984.46,5757 h60
  text "0.05mm (2MIL)" at 12428.46,5615.29 h60
  text "MINIMUM ANNULAR RING" at 11404.23,5611 h60
  text "EXTERNAL" at 13136.46,5611 h60
  text "PER" at 11604.23,5493 h60
  text "IPC-D-275 CLASS 2 LEVEL C" at 11824.23,5493 h60
  text "MIL, HOLES" at 13312.46,5380.71 h60
  text "+/-" at 12920,5380 h60
  text "+/-" at 13774,5380 h60
  text "REGISTRATION TOLERANCES:" at 11404.23,5375 h60
  text "METAL" at 12604,5375 h60
  text "5" at 13180.2,5375 h60
  text "3" at 14013.2,5375 h60
  text "MIL" at 14129.46,5375 h60
  text "+/-" at 13774,5262 h60
  text "HOLE SIZE TOLERANCE (UNLESS OTHERWISE SPECIFIED):" at 11404.23,5257 h60
  text "3" at 14013.2,5257 h60
  text "MIL" at 14129.46,5257 h60
  text "MATERIAL:" at 11329.46,5047.54 h60
  text "FR-4 High Tg" at 12315.9,4907.21 h60
  text "FR-408" at 11750.46,4898.64 h60
  text "OTHER" at 13238.46,4898.64 h60
  text "X" at 12161,4895 h60
  text "62 MIL (1.6mm) +/-10%" at 12070.56,4735.92 h60
  text "THICKNESS:" at 11404.23,4731.64 h60
  text "X" at 11942.4,4731.64 h60
  text "OTHER" at 13355.46,4731.64 h60
  text "TOLERANCE:" at 11404.23,4573.64 h60
  text "X" at 12243.53,4573.64 h60
  text "ANSI IPC-6012 TYPE 3 CLASS 2" at 12430.48,4573.64 h60
  text "OTHER +/-" at 12430.46,4417.64 h60
  text "BOW & TWIST:" at 11404.23,4260.64 h60
  text "X" at 12243.53,4260.64 h60
  text "ANSI IPC-6012 TYPE 3 CLASS 2" at 12430.48,4260.64 h60
  text "OTHER +/-" at 12430.46,4102.13 h60
  text "DRILLING:" at 11329.46,3963.64 h60
  text "REFERENCE:" at 11404.23,3846.64 h60
  text "X" at 12052.46,3846.64 h60
  text "AS SHOWN" at 12239.46,3846.64 h60
  text "X" at 12953.46,3846.64 h60
  text "NC_DRILL FILES" at 13090.46,3846.64 h60
  text "PTH COPPER THICKNESS:" at 11404.23,3688.64 h60
  text "X" at 12534.46,3688.64 h60
  text "20-30 um" at 12671.46,3688.64 h60
  text "OTHER" at 13388.46,3688.64 h60
  text "BOARD FINISH:" at 11329.46,3529.64 h60
  text "SILKSCREEN:" at 11484.68,3411.64 h60
  text "X" at 12433.46,3411.64 h60
  text "TOP" at 12559.46,3411.64 h60
  text "X" at 12943.46,3411.64 h60
  text "BOTTOM" at 13070.46,3411.64 h60
  text "SILKSCREEN COLOR:" at 11484.68,3244.64 h60
  text "X" at 12432.42,3244.64 h60
  text "WHITE" at 12559.46,3244.64 h60
  text "OTHER" at 13070.46,3244.64 h60
  text "X" at 12563.42,3085.44 h60
  text "GREEN" at 12690.46,3085.44 h60
  text "OTHER" at 13308.46,3085.44 h60
  text "SOLDER RESIST COLOR:" at 11484.68,3074.64 h60
  text "X" at 12563.42,2915.44 h60
  text "MATTE" at 12690.46,2915.44 h60
  text "SEMI-GLOSS" at 13308,2914.8 h60
  text "IMMERSION GOLD (ENIG)" at 12390.46,2726.92 h60
  text "ENEPIG" at 13728,2723.64 h60
  text "SURFACE FINISH:" at 11329.46,2722.64 h60
  text "X" at 12203.51,2722.64 h60
  text "IMM. TIN/SILVER OR EQUIV" at 11659,2565.64 h60
  text "OTHER" at 13090.46,2565.64 h60
  text "ARRAY/PANEL:" at 11329.46,2386.64 h60
  text "CUT AND TRIM PER M1 BOARD OUTLINE" at 12390.46,2382.35 h60
  text "N.C. ROUTE" at 12390.46,2230.64 h60
  text "X" at 13069.46,2230.64 h60
  text "V. SCORE" at 13256.46,2230.64 h60
  text "CERTIFICATION:" at 11329.46,2093.64 h60
  text "MATERIALS AND WORKMANSHIP FOR ALL PCBS" at 12054.46,2093.64 h60
  text "TO MEET OR EXCEED THE REQUIREMENTS OF:" at 12054.46,1995.64 h60
  text "X" at 11680.96,1859.13 h60
  text "ANSI IPC-A-600F CLASS ->" at 11819.96,1859.13 h60
  text "X" at 13459.02,1859.13 h60
  text "2" at 13577.96,1859.14 h60
  text "1" at 13262.96,1857.64 h60
  text "3" at 13931.96,1857.64 h60
  text "X" at 12495.02,1699.64 h60
  text "RoHS" at 12631.96,1699.64 h60
  text "OTHER" at 13276.36,1699.64 h60
  text "PER ORDER" at 13673.42,1699.64 h60
  text "ALL BOARDS MUST MEET OR EXCEED UL94-V0 REQUIREMENTS." at 11357,1534 h60
  text "PCB MUST BEAR THE UL94V-0 UL REGISTERED MATERIAL ID NUMBER" at 11357,1414 h60
  text "ADDITIONAL REQUIREMENTS:" at 11329.46,1240.64 h60
  text "MICROSECTION:" at 11404.23,1125.64 h60
  text "YES" at 12309.96,1125.64 h60
  text "REQUIRED" at 13171.46,969.49 h60
  text "BARE BOARD ELEC. TEST:" at 11404.23,966.64 h60
  text "NONE" at 12709.96,966.64 h60
  text "X" at 13044.46,966.64 h60
  text "PER ORDER" at 13763.46,966.64 h60
  text ".Layer_Name" at 577,-858.49 h60
M11 Gerber Information:
  lines w10: -292,-930.17 6308,-930.17 ; -292,-726.83 6310,-726.83 ; -292,-523.5 -292,-1133.5 3713,-1133.5 6310,-1133.5 6310,-523.5 -291.5,-523.5 -291.5,-1133.5 1284,-1133.5 ; 2173,-1133.5 2173,-523.5 ; 3440,-726.83 3440,-523.5 ; 4280,-726.83 4280,-523.5 ; 4902,-1140 4902,-937.17
  text "ALL ARTWORK VIEWED FROM TOP SIDE" at -228.5,-655.67 h60
  text "BOARD #:" at 2248,-655.67 h60
  text ".PRJ_Number" at 2793.5,-655.67 h60
  text "REV:" at 3638,-655.67 h60
  text ".PCB_Rev" at 3929.5,-655.67 h60
  text "SVN REV:" at 4476,-655.67 h60
  text ".VersionControl_RevNumber" at 4982,-655.67 h60
  text "LAYER NAME =" at -228.5,-858.49 h60
  text "TID #:" at 2248,-859 h60
  text ".TID" at 2793.5,-859 h60
  text "PLOT NAME =" at -228.5,-1064.34 h60
  text ".plot_File_Name" at 577,-1064.34 h60
  text "GENERATED    :" at 2250,-1064.34 h60
  text ".Print_Date" at 3119.5,-1064.34 h60
  text ".Print_Time" at 3848.5,-1064.34 h60
  text "TEXAS INSTRUMENTS" at 5113,-1064.34 h60
M12 Stackup:
  drawing of 191 lines, arcs and shapes, not listed
  text "Layer" at 9790.34,7830 h60
  text "Name" at 10200.26,7830 h60
  text "Material" at 11130,7830 h60
  text "Thickness" at 11989.77,7830 h60
  text "Constant" at 12639.6,7830 h60
  text "Board Layer Stack" at 13209.46,7830 h60
  text "1" at 9790.34,7710 h60
  text "Top Overlay" at 10200.26,7710 h60
  text "2" at 9790.34,7590 h60
  text "Top Solder" at 10200.26,7590 h60
  text "Solder Resist" at 11130,7590 h60
  text "0.40mil" at 11989.77,7590 h60
  text "3.5" at 12639.6,7590 h60
  text "3" at 9790.34,7470 h60
  text "Top Layer" at 10200.26,7470 h60
  text "Copper" at 11130,7470 h60
  text "1.40mil" at 11989.77,7470 h60
  text "4" at 9790.34,7350 h60
  text "Dielectric1" at 10200.26,7350 h60
  text "FR-4" at 11130,7350 h60
  text "59.20mil" at 11989.77,7350 h60
  text "4.8" at 12639.6,7350 h60
  text "5" at 9790.34,7230 h60
  text "Bottom Layer" at 10200.26,7230 h60
  text "Copper" at 11130,7230 h60
  text "1.40mil" at 11989.77,7230 h60
  text "6" at 9790.34,7110 h60
  text "Bottom Solder" at 10200.26,7110 h60
  text "Solder Resist" at 11130,7110 h60
  text "0.40mil" at 11989.77,7110 h60
  text "3.5" at 12639.6,7110 h60
  text "7" at 9790.34,6990 h60
  text "Bottom Overlay" at 10200.26,6990 h60
  text ".Layer_Name" at 577,-858.49 h60
M13 Component Bodies Top:
  text ".Layer_Name" at 577,-858.49 h60
M14 Component Bodies Bottom:
  text ".Layer_Name" at 577,-858.49 h60
M15 Courtyards Top:
  text ".Layer_Name" at 577,-858.49 h60
M16 Courtyards Bottom:
  text ".Layer_Name" at 577,-858.49 h60
Drill Drawing:
  circle w10: c5363.72,2520.36 r27.63
  lines w10: 5336.09,2133.59 5349.9,2133.59 5363.72,2119.78 5377.53,2133.59 5391.34,2133.59 5377.53,2147.4 5391.34,2161.22 5377.53,2161.22 5363.72,2175.03 5349.9,2161.22 5336.09,2161.22 5349.9,2147.4 5336.09,2133.59 ; 5336.09,2271.72 5363.72,2244.1 5391.34,2271.72 5363.72,2299.35 5336.09,2271.72 ; 5336.09,2423.67 5391.34,2423.67 5363.72,2368.42 5336.09,2423.67 ; 5336.09,2617.06 5363.72,2630.87 5391.34,2617.06 5377.53,2644.68 5391.34,2672.31 5363.72,2658.5 5336.09,2672.31 5349.9,2644.68 5336.09,2617.06 ; 5336.09,2741.38 5336.09,2755.19 5349.9,2769 5336.09,2782.82 5336.09,2796.63 5349.9,2796.63 5363.72,2782.82 5377.53,2796.63 5391.34,2796.63 5391.34,2782.82 5377.53,2769 5391.34,2755.19 5391.34,2741.38 5377.53,2741.38 5363.72,2755.19 5349.9,2741.38 5336.09,2741.38 ; 5336.09,2879.51 5349.9,2879.51 5349.9,2865.7 5377.53,2865.7 5377.53,2879.51 5391.34,2879.51 5391.34,2907.14 5377.53,2907.14 5377.53,2920.95 5349.9,2920.95 5349.9,2907.14 5336.09,2907.14 5336.09,2879.51 ; 5336.09,3003.83 5349.9,3003.83 5363.72,2990.02 5377.53,3003.83 5391.34,3003.83 5377.53,3017.64 5391.34,3031.46 5377.53,3031.46 5363.72,3045.27 5349.9,3031.46 5336.09,3031.46 5349.9,3017.64 5336.09,3003.83 ; 5336.09,3114.34 5391.34,3114.34 5391.34,3169.59 5336.09,3169.59 5336.09,3114.34 ; 5336.09,3293.91 5391.34,3293.91 5363.72,3238.66 5336.09,3293.91 ; 5347.14,3009.35 5355.43,3009.35 5363.72,3001.07 5372.01,3009.35 5380.29,3009.35 5372.01,3017.64 5380.29,3025.93 5372.01,3025.93 5363.72,3034.22 5355.43,3025.93 5347.14,3025.93 5355.43,3017.64 5347.14,3009.35 ; 5347.14,3282.86 5380.29,3282.86 5363.72,3249.71 5347.14,3282.86
  lines w12: 5286,2082.48 8517.49,2082.48 ; 5286,3325.68 8517.49,3325.68 ; 5623.86,1958.16 5623.86,3450 ; 5955.86,1958.16 5955.86,3450 ; 6592.43,1958.16 6592.43,3450 ; 6851.57,1958.16 6851.57,3450 ; 7226.72,1958.16 7226.72,3450 ; 7951.05,1958.16 7951.05,3450 ; 5286,1958.16 8517.49,1958.16 8517.49,3450 5286,3450 5286,1958.16
  text "Symbol" at 5360.59,3362.98 h72
  text "Quantity" at 5661.16,3362.98 h72
  text "Finished Hole Size" at 5993.16,3362.98 h72
  text "Plated" at 6629.72,3362.98 h72
  text "Hole Type" at 6888.86,3362.98 h72
  text "Drill Layer Pair" at 7264.02,3362.98 h72
  text "Hole Tolerance" at 7988.35,3362.98 h72
  text "8" at 5661.16,3238.66 h60
  text "18.00mil (0.457mm)" at 5993.16,3238.66 h60
  text "PTH" at 6629.72,3238.66 h60
  text "Round" at 6888.86,3238.66 h60
  text "Top Layer - Bottom Layer" at 7264.02,3238.66 h60
  text "2" at 5661.16,3114.34 h60
  text "31.00mil (0.787mm)" at 5993.16,3114.34 h60
  text "PTH" at 6629.72,3114.34 h60
  text "Round" at 6888.86,3114.34 h60
  text "Top Layer - Bottom Layer" at 7264.02,3114.34 h60
  text "2" at 5661.16,2990.02 h60
  text "31.50mil (0.800mm)" at 5993.16,2990.02 h60
  text "PTH" at 6629.72,2990.02 h60
  text "Round" at 6888.86,2990.02 h60
  text "Top Layer - Bottom Layer" at 7264.02,2990.02 h60
  text "4" at 5661.16,2865.7 h60
  text "33.46mil (0.850mm)" at 5993.16,2865.7 h60
  text "PTH" at 6629.72,2865.7 h60
  text "Round" at 6888.86,2865.7 h60
  text "Top Layer - Bottom Layer" at 7264.02,2865.7 h60
  text "2" at 5661.16,2741.38 h60
  text "35.00mil (0.889mm)" at 5993.16,2741.38 h60
  text "PTH" at 6629.72,2741.38 h60
  text "Round" at 6888.86,2741.38 h60
  text "Top Layer - Bottom Layer" at 7264.02,2741.38 h60
  text "4" at 5661.16,2617.06 h60
  text "35.43mil (0.900mm)" at 5993.16,2617.06 h60
  text "PTH" at 6629.72,2617.06 h60
  text "Round" at 6888.86,2617.06 h60
  text "Top Layer - Bottom Layer" at 7264.02,2617.06 h60
  text "2" at 5661.16,2492.74 h60
  text "37.40mil (0.950mm)" at 5993.16,2492.74 h60
  text "PTH" at 6629.72,2492.74 h60
  text "Round" at 6888.86,2492.74 h60
  text "Top Layer - Bottom Layer" at 7264.02,2492.74 h60
  text "2" at 5661.16,2368.42 h60
  text "41.34mil (1.050mm)" at 5993.16,2368.42 h60
  text "PTH" at 6629.72,2368.42 h60
  text "Round" at 6888.86,2368.42 h60
  text "Top Layer - Bottom Layer" at 7264.02,2368.42 h60
  text "8" at 5661.16,2244.1 h60
  text "47.24mil (1.200mm)" at 5993.16,2244.1 h60
  text "PTH" at 6629.72,2244.1 h60
  text "Round" at 6888.86,2244.1 h60
  text "Top Layer - Bottom Layer" at 7264.02,2244.1 h60
  text "6" at 5661.16,2119.78 h60
  text "55.12mil (1.400mm)" at 5993.16,2119.78 h60
  text "PTH" at 6629.72,2119.78 h60
  text "Round" at 6888.86,2119.78 h60
  text "Top Layer - Bottom Layer" at 7264.02,2119.78 h60
  text "40 Total" at 5661.16,1995.46 h60
  text ".Layer_Name" at 577,-858.49 h60
M17 Embedded Cavity:
  text ".Layer_Name" at 577,-858.49 h60
M18 Embedded Assembly:
  text ".Layer_Name" at 577,-858.49 h60
M19 Embedded Keepout:
  text ".Layer_Name" at 577,-858.49 h60

## Dimensions
0,0 to 2598.43,0 on M2 Board Dimensions
0,0 to 0,1968.5 on M2 Board Dimensions
0,-400 to 1000,-400 on M2 Board Dimensions

## Text inside footprints (layer, text, board x,y; h text height)
C2: Top Overlay "+" at 90,1200 h40; M5 Assembly Top "+" at 23.9,1040.32 h40
C3: Top Overlay "+" at 710.32,1696.1 h40 r270; M5 Assembly Top "+" at 710.32,1696.1 h40 r270
C5: Top Overlay "+" at 2060,1960 h59.05 r270; M5 Assembly Top "+" at 2180.47,1967.8 h59.05 r270